# EAGLE board MAX4466v1 (EAGLE 5.06)
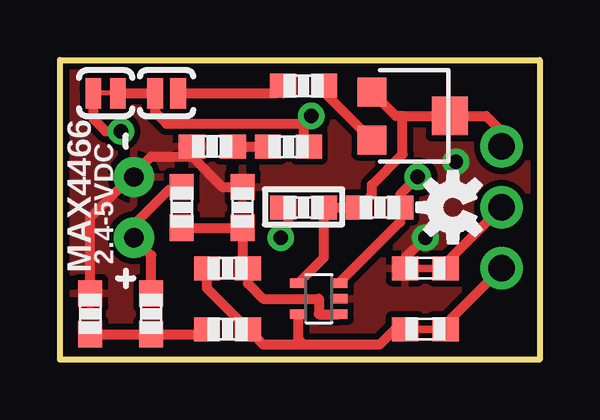
[diagram p0: board, top side]
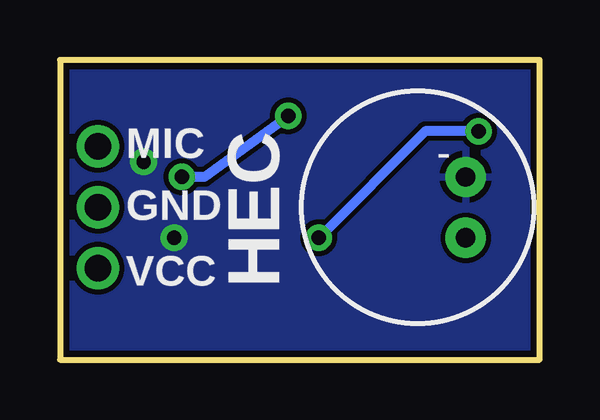
[diagram p1: board, bottom side, seen from below]

Size 20 x 12.5 mm. Coordinates in mm from the lower left corner, seen from the top.
Outline: 0,0 0,12.5 20,12.5 20,0 0,0
Copper layers (1*16): Top 0.035mm / dielectric 1.5mm / Bottom 0.035mm
Design rules "Sparkfun": minimum track width 8mil, minimum drill 20mil, track to track 8mil, track to pad 8mil, pad to pad 8mil, via to via 8mil, smd to smd 8mil, copper to edge 10mil, drill to drill 8mil, minimum pad ring 12mil, minimum via ring 10mil, stop-mask expansion 4mil, vias tented up to drill 25mil, thermal gap 10mil

## Footprints (pad centres in the part's own frame; a part is rotated, then mirrored left to right if it is on the bottom)
0603-RES = smd 1.1 x 1: 1 -0.85,0; 2 0.85,0
M03 = drill 1.1 pad 1.778 round: 1 0,0; 2 0,-2.54; 3 0,-5.08
SC70 = smd 0.4 x 0.7: 1 -0.65,-0.85; 2 0,-0.85; 3 0.65,-0.85; 4 0.65,0.85; 5 -0.65,0.85
SOLDE-JUMPER-NC = smd 0.635 x 1.27: 3 -0.508,0; 4 0.508,0
0603-JUMPER = smd 1.1 x 1: 1 -0.85,0; 2 0.85,0
SOLDER-JUMPER = smd 0.66 x 1.27: P$1 -0.476,0; P$2 0.476,0
MIC-9.7MM = drill 0.8 pad 1.676 round: 1 -2,1.27; 2 -2,-1.27
TRIMPOT = smd 1.2 x 1.2: 1 -1,-1.6; 3 1,-1.6 | smd 1.6 x 1.5: 2 0,1.65

## Placement (x,y rotation side)
C1  10uF  [0603-RES]  6.35,8.89 0 top
C2  100pF  [0603-RES]  13.34,6.35 180 top
C3  0.01u  [0603-RES]  5.08,6.35 270 top
C4  0.1u  [0603-RES]  1.27,1.91 90 top
J1  M03  [M03]  18.41,3.81 180 bottom
Q1  MAX4466  [SC70]  10.79,2.54 90 top
R1  1k  [0603-RES]  9.53,8.89 180 top
R2  22  [0603-RES]  10.16,11.43 180 top
R3  100k  [0603-RES]  10.16,6.35 180 top
R4  1M  [0603-RES]  7.62,6.35 90 top
R5  1M  [0603-RES]  6.99,3.81 0 top
R6  1k  [0603-RES]  3.81,1.91 90 top
R7  1k  [0603-RES]  6.99,1.27 180 top
S1  SOLDERJUMPER-NC  [SOLDE-JUMPER-NC]  1.91,11.11 180 top
U$1  0603-JUMPER  [0603-JUMPER]  15.24,1.27 0 top
U$2  0603-JUMPER  [0603-JUMPER]  15.24,3.81 0 top
U$8  SOLDERJUMPER  [SOLDER-JUMPER]  4.45,11.11 0 top
U$11  MIC9.7MM  [MIC-9.7MM]  5.08,6.35 180 bottom
U$15  [OPEN-SO-LOGO]  16.38,6.35 90 top
VR1  100k  [TRIMPOT]  14.61,10.16 270 top

## Library data of the parts
C1-C4 J1 Q1 R1-R7 S1 U$1 U$2 U$8 U$15 VR1 = Travis
U$11 = SparkFun

## Nets
GND: C1.1 C4.2 Q1.2 R4.2 U$2.1 U$11.2
N$1: J1.1 U$1.2
N$2: J1.2 U$2.2
N$3: C2.1 Q1.3 R1.1 S1.3 U$8.P$1
N$4: C1.2 R1.2
N$5: R2.1 VR1.3
N$6: R2.2 U$8.P$2
N$7: R3.2 S1.4
N$8: C4.1 R6.1 R7.2
N$9: C3.2 Q1.1 R4.1 R5.2
N$10: C3.1 R6.2 U$11.1
OUT: C2.2 J1.3 Q1.4 R3.1 VR1.1 VR1.2
VCC: Q1.5 R5.1 R7.1 U$1.1

## Tracks (layer width: path | path; a pad name or v marks a point on that pad's centre or on a via)
GND  (via drill 0.6)
  Top 0.406: 5.5,8.47 C1.1 | 5.5,8.47 6.77,7.2 R4.2 | C4.2 1.27,5.93 3.81,8.47 5.5,8.47 | v15.24,5.08 14.39,4.23 U$2.1
  other vias: 16.51,8.26
  pour Top (isolate 0.254): 0,12.5 20,12.5 20,0 0,0
  pour Bottom: 0,12.5 20,12.5 20,0 0,0
N$1
  Top 0.406: U$1.2 16.09,1.49 J1.1
N$2
  Top 0.406: U$2.2 16.09,4.03 J1.2
N$3  (via drill 0.6)
  Top 0.406: S1.3 U$8.P$1 3.97,10.32 4.45,9.84 10.16,9.84 | v14.92,7.62 14.19,6.88 C2.1 14.19,5.73 Q1.3 | R1.1 10.16,9.11 10.16,9.84 | 10.16,9.84 v10.48,10.16
  Bottom 0.406: v10.48,10.16 13.97,7.62 v14.92,7.62
N$4
  Top 0.406: C1.2 R1.2
N$5
  Top 0.406: R2.1 11.01,11.15 VR1.3
N$6
  Top 0.406: 9.31,11.11 R2.2 arc-90 8.99,11.11 U$8.P$2
N$7  (via drill 0.6)
  Top 0.406: 1.27,11.3 S1.4 1.4,10.03 1.91,9.53 v2.54,9.53 | R3.2 9.53,6.13 9.53,5.71 v9.21,5.08
  Bottom 0.406: v2.54,9.53 4.76,9.53 v9.21,5.08
N$8
  Top 0.406: 5.92,1.05 R7.2 6.13,1.05 R6.1 C4.1
N$9
  Top 0.406: C3.2 R4.1 7.62,4.03 R5.2 7.83,3.17 8.47,2.54 10.79,2.54 10.79,1.89 Q1.1
N$10
  Top 0.406: C3.1 5.08,7.08 4.54,7.08 3.08,5.62 U$11.1 3.81,4.35 R6.2
OUT
  Top 0.406: VR1.1 14.01,10.16 14.29,10.16 | 14.29,10.16 VR1.2 17.78,10.16 18.41,9.53 J1.3 | 14.29,10.16 14.29,8.57 13.01,7.29 13.01,6.87 C2.2 R3.1 11.01,4.25 Q1.4
VCC
  Top 0.406: U$1.1 13.97,1.27 13.34,0.64 10.16,0.64 | R5.1 6.13,2.97 R7.1 8.47,0.64 10.16,0.64 | Q1.5 9.95,0.85 10.16,0.64

## Text on the board
tPlace: MAX4466 | 2.4-5VDC
bPlace: MIC | GND | VCC
bNames: HEC